# Altium PCB S88N_Occupancy_Detector.PcbDoc
Units mil, origin at the board's own origin, x right, y up, seen from the top; angles counter-clockwise.
Board outline 4800 x 4000 mil, 2 copper layers (Top Layer, Bottom Layer); 54 components, 90 nets, 338 pads, 4 vias.
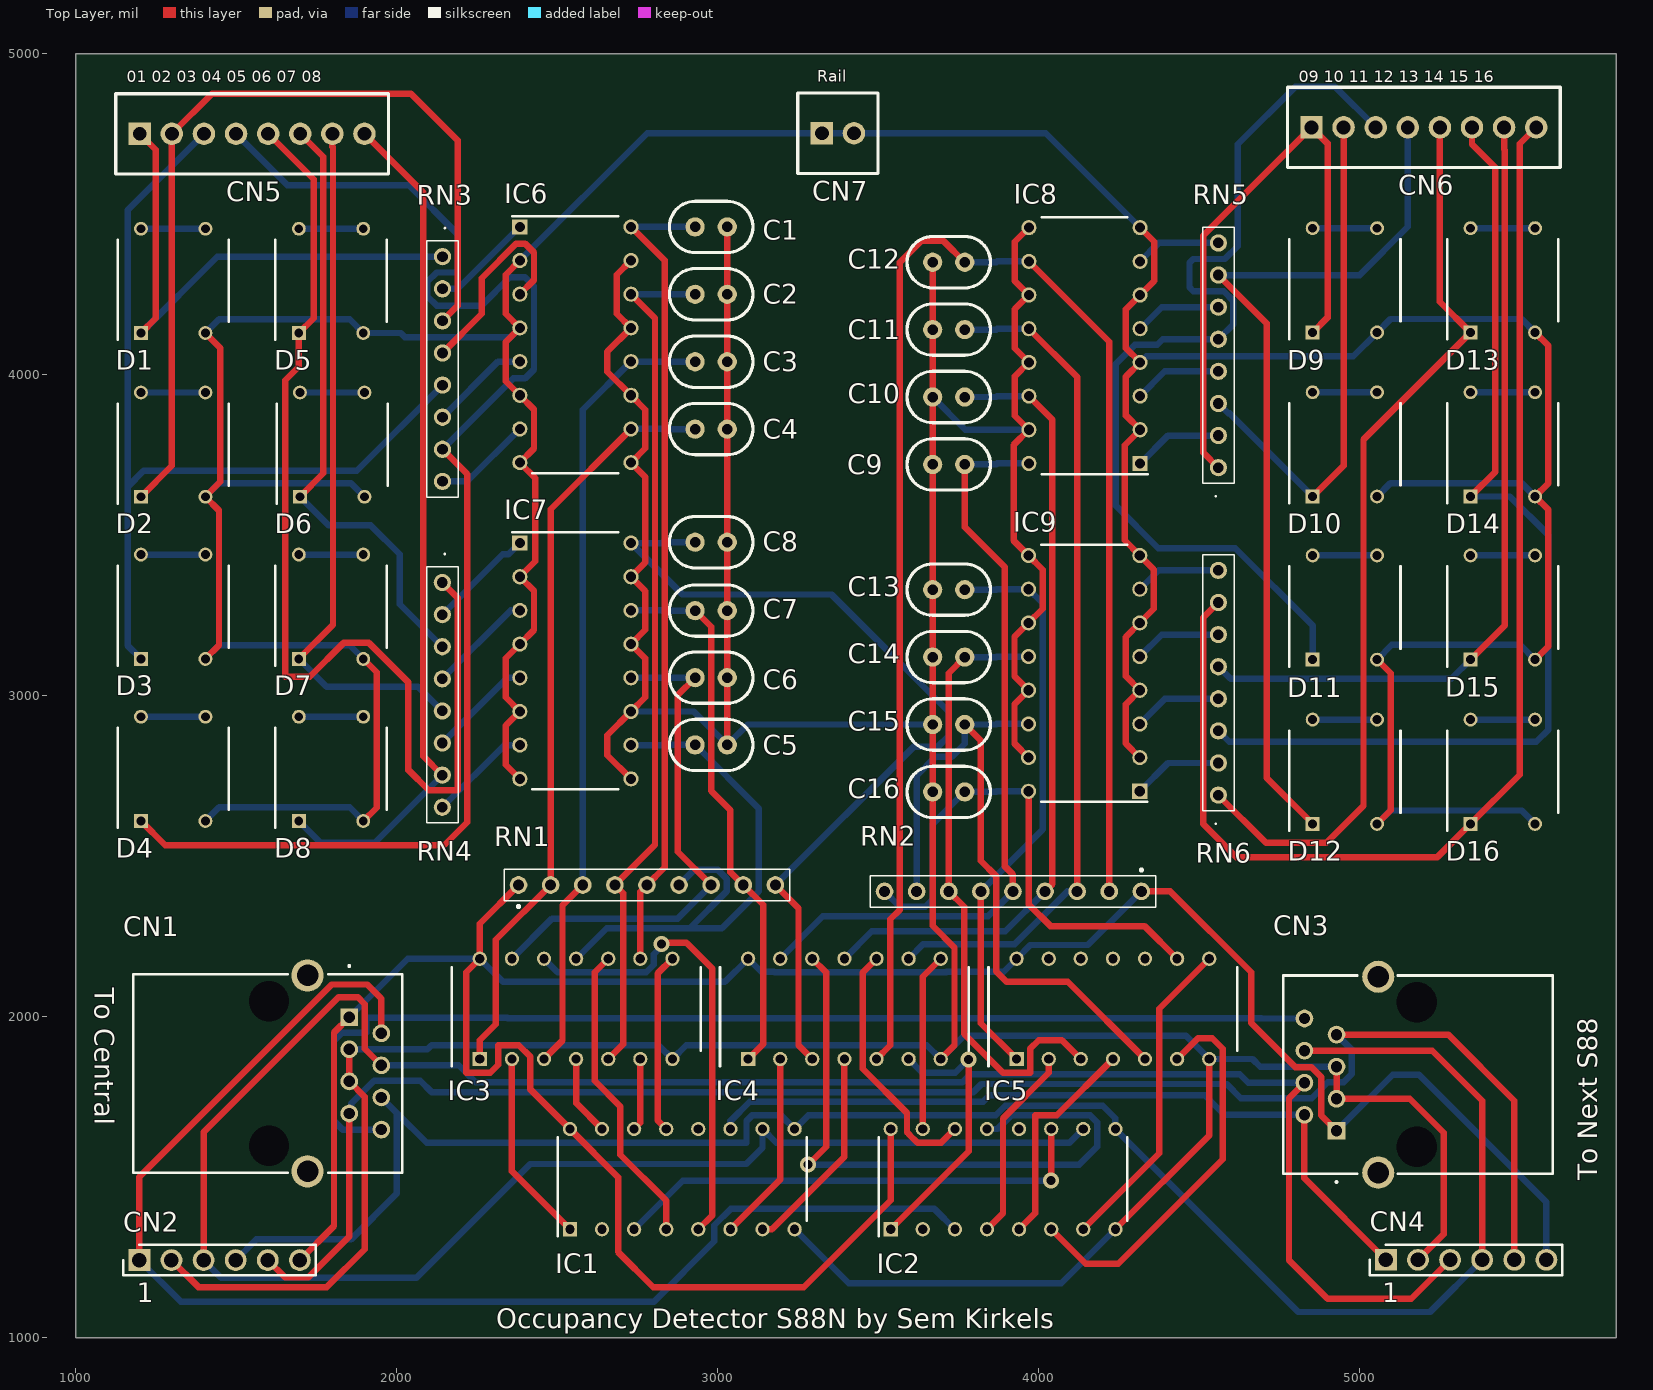
[diagram p0: Top Layer view]
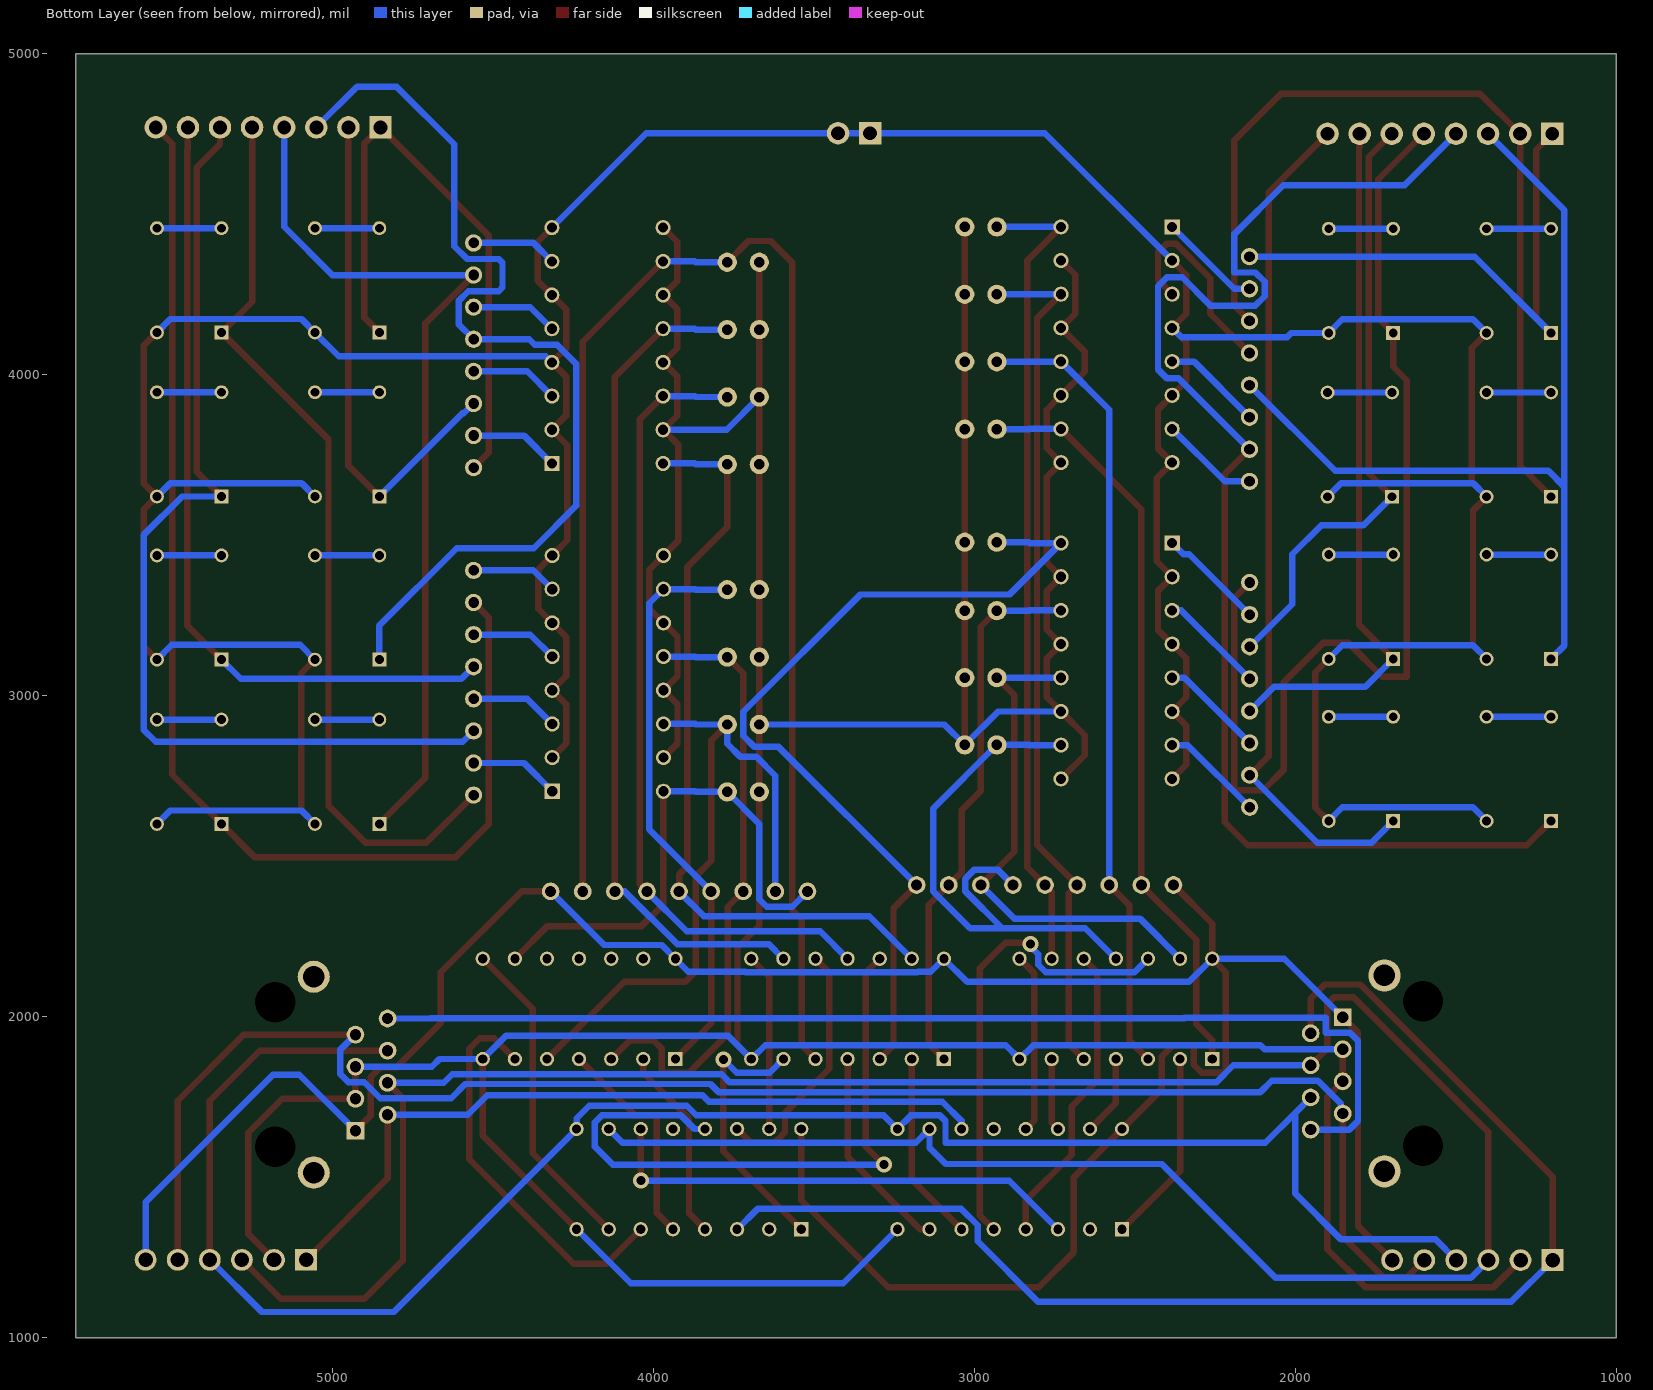
[diagram p1: Bottom Layer view, seen from below]
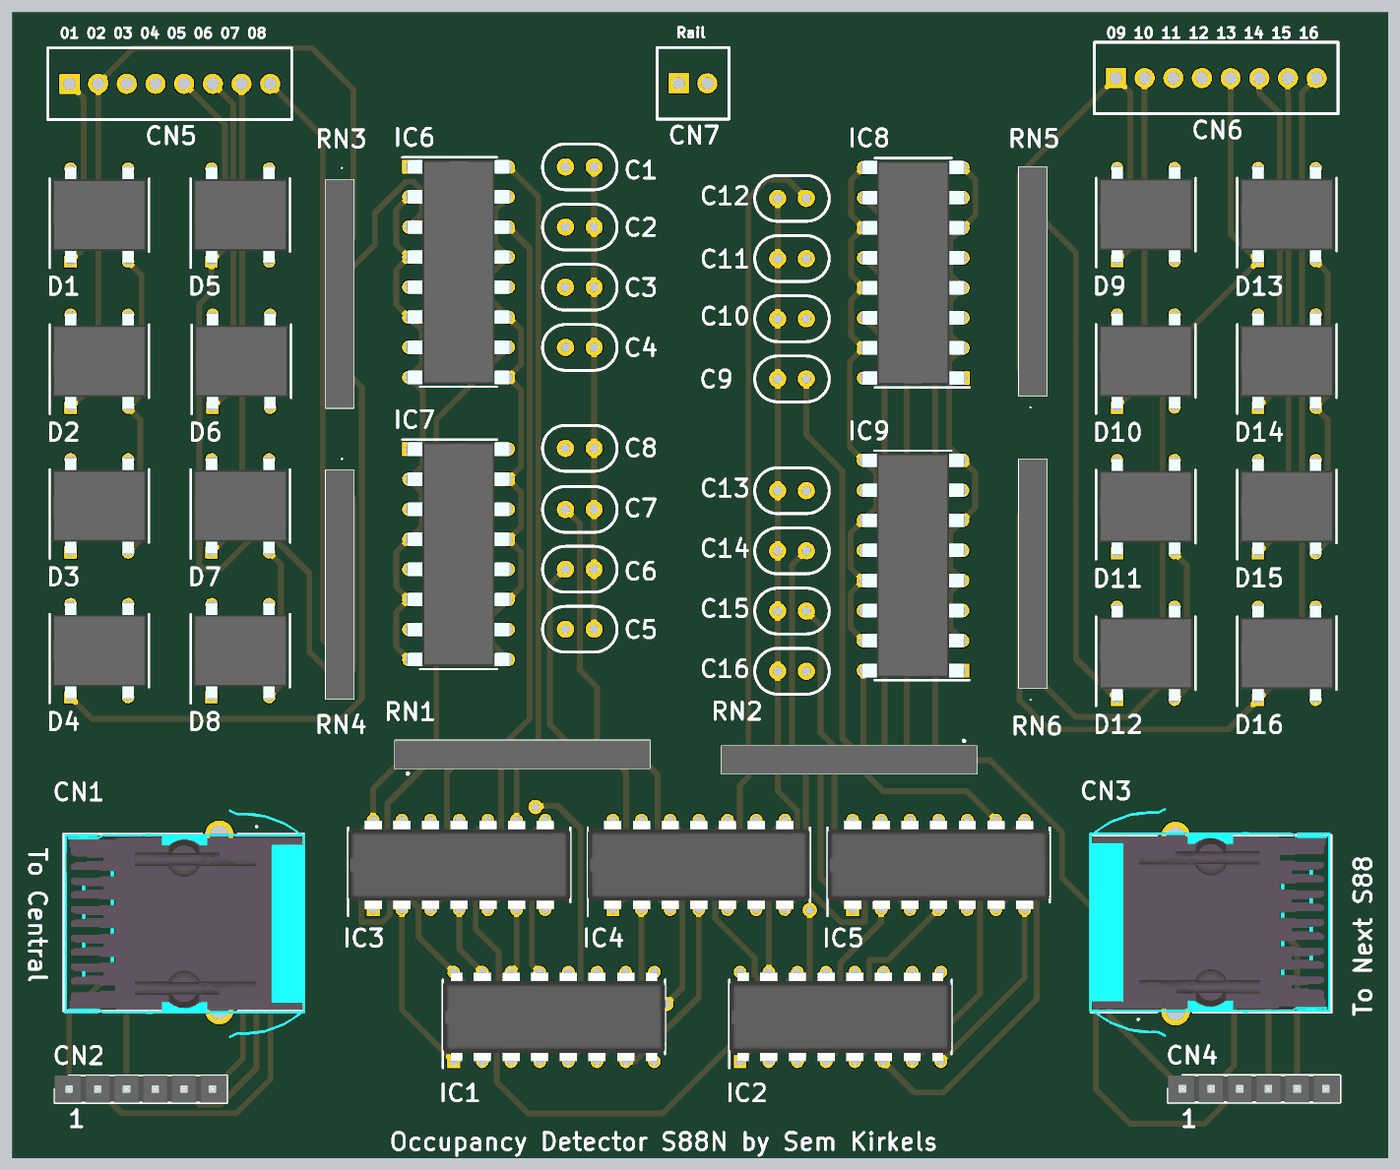
[diagram p2: 3D render of the assembled board from above, using the file's embedded part models]

## Layer stack, top to bottom
Top Solder: solder mask 0.4, Solder Resist, Dk 3.5
Top Layer: signal copper 1.4
Dielectric 1: dielectric 12.6, FR-4, Dk 4.8
Bottom Layer: signal copper 1.4
Bottom Solder: solder mask 0.4, Solder Resist, Dk 3.5

## Board outline
1000,1000 5800,1000 5800,5000 1000,5000

## Design rules (kind name [scope] priority, off if disabled: settings)
Clearance [All] p1: gap=10 ignorepadtopadclearanceinfootprint=FALSE except(0: Arc-Hole Track-Hole SMDPad-Hole THPad-Hole Via-Hole Fill-Hole Poly-Hole Region-Hole Text-Hole)
PolygonConnect [All] p1: connectstyle=Relief reliefconductorwidth=10 reliefentries=4 polygonreliefangle="90 Angle" airgapwidth=10
RoutingVias [All] p1: holewidth=28 width=50 viastyle="Through Hole" minholewidth=28 minwidth=50 maxholewidth=28 maxwidth=50
SolderMaskExpansion [All] p1: expansion=4 istentingtop=FALSE
Width [All] p1: maxlimit=20 minlimit=20 preferedwidth=20 minimp=50.000000 maximp=50.000000 favimp=50.000000
30 further rules are at their usual default settings.

## Classes and differential pairs
component class Databus: CN1 CN2 CN3 CN4
component class Shiftregister: IC1 IC2
component class Inverter: C1 C2 C3 C4 C5 C6 C7 C8 C9 C10 C11 C12 C13 C14 C15 C16 IC3 IC4 IC5 RN1 RN2
component class Current_Detection_Connectors: CN5 CN6 CN7
component class Current_Detection_9_16: D9 D10 D11 D12 D13 D14 D15 D16 IC8 IC9 RN5 RN6
component class Current_Detection_1_8: D1 D2 D3 D4 D5 D6 D7 D8 IC6 IC7 RN3 RN4

## Components (designator, comment, footprint, x,y, rotation, side; value= is the part's Value field where it differs from the comment)
C1 "10 nF" Capacitor 2930,4460 r0 top
C2 "10 nF" Capacitor 2930,4250 r0 top
C3 "10 nF" Capacitor 2930,4040 r0 top
C4 "10 nF" Capacitor 2930,3830 r0 top
C5 "10 nF" Capacitor 2930,2846.38 r0 top
C6 "10 nF" Capacitor 2930,3055.83 r0 top
C7 "10 nF" Capacitor 2930,3264.65 r0 top
C8 "10 nF" Capacitor 2930,3477.81 r0 top
C9 "10 nF" Capacitor 3770,3720 r180 top
C10 "10 nF" Capacitor 3770,3930 r180 top
C11 "10 nF" Capacitor 3770,4140 r180 top
C12 "10 nF" Capacitor 3770,4350 r180 top
C13 "10 nF" Capacitor 3770,3330 r180 top
C14 "10 nF" Capacitor 3770,3120 r180 top
C15 "10 nF" Capacitor 3770,2910 r180 top
C16 "10 nF" Capacitor 3770,2700 r180 top
CN1 "To Central" RJ45_Connector 1852.59,1998.18 r270 top
CN2 "To Central" "6 pin header" 1198.85,1241.54 r0 top
CN3 "To Next S88N" RJ45_Connector 4928.04,1644.06 r90 top
CN4 "To Next S88" "6 pin header" 5081.78,1242.48 r0 top
CN5 "DG308 2.54-8" "DG308 2.54-8" 1200,4750 r0 top
CN6 "DG308 2.54-8" "DG308 2.54-8" 4850,4770 r0 top
CN7 "DG308 2.54-2" "DG308 2.54-2" 3324.8,4751.63 r0 top
D1 "B140C1000DIP_DB101" FBR_B140C1000DIP 1304.06,4291.79 r90 top
D2 "B140C1000DIP_DB101" FBR_B140C1000DIP 1304.06,3781.79 r90 top
D3 "B140C1000DIP_DB101" FBR_B140C1000DIP 1304.06,3276.79 r90 top
D4 "B140C1000DIP_DB101" FBR_B140C1000DIP 1304.06,2771.79 r90 top
D5 "B140C1000DIP_DB101" FBR_B140C1000DIP 1795.94,4291.79 r90 top
D6 "B140C1000DIP_DB101" FBR_B140C1000DIP 1799.5,3781.79 r90 top
D7 "B140C1000DIP_DB101" FBR_B140C1000DIP 1795.94,3276.79 r90 top
D8 "B140C1000DIP_DB101" FBR_B140C1000DIP 1795.94,2771.79 r90 top
D9 "B140C1000DIP_DB101" FBR_B140C1000DIP 4954.06,4293.55 r90 top
D10 "B140C1000DIP_DB101" FBR_B140C1000DIP 4954.06,3782.49 r90 top
D11 "B140C1000DIP_DB101" FBR_B140C1000DIP 4954.06,3274.36 r90 top
D12 "B140C1000DIP_DB101" FBR_B140C1000DIP 4954.06,2762.7 r90 top
D13 "B140C1000DIP_DB101" FBR_B140C1000DIP 5445.94,4293.55 r90 top
D14 "B140C1000DIP_DB101" FBR_B140C1000DIP 5445.94,3782.49 r90 top
D15 "B140C1000DIP_DB101" FBR_B140C1000DIP 5445.94,3274.36 r90 top
D16 "B140C1000DIP_DB101" FBR_B140C1000DIP 5445.94,2762.7 r90 top
IC1 "CD4014BE" CD4014 2890,1493.7 r90 top
IC2 "CD4014BE" CD4014 3889.14,1493.7 r90 top
IC3 "SN74HC04N" SN74HC04 2559.35,2024.16 r90 top
IC4 "SN74HC04N" SN74HC04 3395.11,2024.16 r90 top
IC5 "SN74HC04N" SN74HC04 4231.48,2024.16 r90 top
IC6 "LTV-844" LTV844 2557.16,4092.86 r0 top
IC7 "LTV-844" LTV844 2557.16,3107.93 r0 top
IC8 "LTV-844" LTV844 4142.92,4090.35 r180 top
IC9 "LTV-844" LTV844 4141.96,3069.13 r180 top
RN1 "SIL 9-8 10K" "SIL 9-8 10K" 2380,2410 r0 top
RN2 "SIL 9-8 10K" "SIL 9-8 10K" 4320,2390 r180 top
RN3 "SIL 8-4 22" "SIL 8-4" 2142.91,4367.19 r270 top
RN4 "SIL 8-4 22" "SIL 8-4" 2142.5,3352.19 r270 top
RN5 "SIL 8-4 22" "SIL 8-4" 4560,3710 r90 top
RN6 "SIL 8-4 22" "SIL 8-4" 4560,2690 r90 top

## Footprints (in the part's own frame and the unit in brackets; to place one, negate y for a bottom-side part, rotate by r counter-clockwise, add the part's x,y. Pads: shape width x height; smd on the part's side, far side on the other; paste and mask are expansions set on the pad)
"6 pin header" [mm] "HDRV6W67P0X254_1X6_1524X241X1062P"
  rect 1.725x1.725 hole 1.15: 1(0,0)
  round 1.725 hole 1.15: 2(2.54,0) 3(5.08,0) 4(7.62,0) 5(10.16,0) 6(12.7,0)
  silkscreen extent -1.27,-1.2 13.97,1.21, body extent -1.27,-1.2 13.97,1.2, height 10.62
Capacitor [mil]
  round 60 hole 32.5: 1(0,0) 2(100,0)
  silkscreen extent -80,-80 180,80
CD4014 [mm] "DIP794W53P254L1930H508Q16N"
  rect 1.13x1.13 hole 0.73: 1(-3.97,8.89)
  round 1.13 hole 0.73: 2(-3.97,6.35) 3(-3.97,3.81) 4(-3.97,1.27) 5(-3.97,-1.27) 6(-3.97,-3.81) 7(-3.97,-6.35) 8(-3.97,-8.89) 9(3.97,-8.89) 10(3.97,-6.35) 11(3.97,-3.81) 12(3.97,-1.27) 13(3.97,1.27) 14(3.97,3.81) 15(3.97,6.35) 16(3.97,8.89)
  silkscreen extent -4.53,-9.84 3.3,9.84, body extent -3.94,-9.84 3.94,9.84, height 5.35
"DG308 2.54-2" [mil] "DG308 2.54-2"
  rect 70x70 hole 43.31: 1(0,0)
  round 70 hole 43.31: 2(100,0)
  silkscreen extent -75,-125 175,125
"DG308 2.54-8" [mil] "DG308 2.54-8"
  rect 70x70 hole 43.31: 1(0,0)
  round 70 hole 43.31: 2(100,0) 3(200,0) 4(300,0) 5(400,0) 6(500,0) 7(600,0) 8(700,0)
  silkscreen extent -75,-125 775,125
FBR_B140C1000DIP [mm]
  rect 1.1x1.1 hole 0.7: 1(-4.125,2.55)
  round 1.1 hole 0.7: 2(-4.125,-2.55) 3(4.125,-2.55) 4(4.125,2.55)
  silkscreen extent -4.68,-4.4 3.25,4.4, body extent -4.25,-4.15 4.25,4.15, height 4.9
LTV844 [mm]
  rect 1.2x1.2 hole 0.8: 1(-4.4,9.328)
  round 1.2 hole 0.8: 2(-4.4,6.662) 3(-4.4,3.998) 4(-4.4,1.332) 5(-4.4,-1.332) 6(-4.4,-3.998) 7(-4.4,-6.662) 8(-4.4,-9.328) 9(4.4,-9.328) 10(4.4,-6.662) 11(4.4,-3.998) 12(4.4,-1.332) 13(4.4,1.332) 14(4.4,3.998) 15(4.4,6.662) 16(4.4,9.328)
  silkscreen extent -5,-10.17 3.4,10.17, body extent -4.55,-9.93 4.55,9.93, height 4.5
RJ45_Connector [mm] "2562910000"
  rect 1.4x1.4 hole 0.9: 1(0,0)
  round 1.4 hole 0.9: 2(1.27,2.54) 3(2.54,0) 4(3.81,2.54) 5(5.08,0) 6(6.35,2.54) 7(7.62,0) 8(8.89,2.54)
  round 2.55 hole 1.7: MH1(-3.305,-3.3) MH2(12.195,-3.3)
  round 1.6 hole 3.2 unplated: MH3(-1.27,-6.35) MH4(10.16,-6.35)
  silkscreen extent -4.1,-17.1 12.29,4.2, body extent -5.61,-17.03 14.73,4.33, height 8.52
"SIL 8-4" [mm]
  round 1.365 hole 0.84: 1(0,0) 2(2.54,0) 3(5.08,0) 4(7.62,0) 5(10.16,0) 6(12.7,0) 7(15.24,0) 8(17.78,0)
  silkscreen extent -2.31,-1.24 19.02,1.24, body extent -1.24,-1.24 19.03,1.24, height 5.18
"SIL 9-8 10K" [mil] "CSC09A0110K0GEK"
  round 55 hole 33.86: 1(0,0) 2(100,0) 3(200,0) 4(300,0) 5(400,0) 6(500,0) 7(600,0) 8(700,0) 9(800,0)
  silkscreen extent -45,-71 845,49, body extent -45,-49 845,49, height 199
SN74HC04 [mm]
  rect 1.13x1.13 hole 0.73: 1(-3.97,7.62)
  round 1.13 hole 0.73: 2(-3.97,5.08) 3(-3.97,2.54) 4(-3.97,0) 5(-3.97,-2.54) 6(-3.97,-5.08) 7(-3.97,-7.62) 8(3.97,-7.62) 9(3.97,-5.08) 10(3.97,-2.54) 11(3.97,0) 12(3.97,2.54) 13(3.97,5.08) 14(3.97,7.62)
  silkscreen extent -4.53,-9.85 3.3,9.85, body extent -3.94,-9.84 3.94,9.84, height 5.09

## Part data
C1 C2 C3 C4 C5 C6 C7 C8 C9 C10 C11 C12 C13 C14 C15 C16: library part Capacitor, Capacitance=4.7nF, Case/Package=Radial, Dielectric=Y5U, Max Operating Temperature=125°C, Min Operating Temperature=-40°C, Package Quantity=500, Resistor Type=Ceramic, Tolerance=20%, Voltage=500V, Construction=RADIAL, Contact Plating=Tin, Depth=5mm, Diameter=16mm, Height=19mm, Height - Seated (Max)=0.787inch, Lead Diameter=0.6mm, Lead Pitch=10mm, Lead/Base Style=Kinked, Mount="Through Hole", Packaging="Tape and Reel", Radiation Hardening=No, RoHS Compliant=Yes, Series=VY1, Termination=Radial, Thickness=5mm, Voltage Rating (AC)=500V, Voltage Rating (DC)=500V
CN1 CN3: library part RJ45_Connector, "Connector", Manufacturer_Name=Weidmuller, Manufacturer_Part_Number=2562910000, Mouser Part Number=470-2562910000, Datasheet Link=https://catalog.weidmueller.com/catalog/Start.do?localeId=en&ObjectID=2562910000, Height=13.76mm, Mouser Price/Stock=https://www.mouser.co.uk/ProductDetail/Weidmuller/2562910000?qs=w%2Fv1CP2dgqr4xNEXLArdDQ%3D%3D
CN2 CN4: library part "6 pin header", "78511-406", Manufacturer_Name="Amphenol Communication Solutions", Mouser Part Number=649-78511-406, Arrow Part Number=78511-406, Arrow Price/Stock=https://www.arrow.com/en/products/78511-406/amphenol-fci, Datasheet Link=https://cdn.amphenol-cs.com/media/wysiwyg/files/drawing/68000.pdf, Height=10.62mm, Manufacturer_Part_Number=78511-406, Mouser Price/Stock=https://www.mouser.co.uk/ProductDetail/Amphenol-FCI/78511-406?qs=44C8ns5dLY9MkbPan6dMVA%3D%3D
CN5 CN6: library part 8_Pin_Screw_Connector
CN7: library part 2_Pin_Screw_Connector
D1 D2 D3 D4 D5 D6 D7 D8 D9 D10 D11 D12 D13 D14 D15 D16: "Bridge Rectifier", Manufacturer_Name=Rectron, Manufacturer_Part_Number=DB101, Mouser Part Number=583-DB101, Datasheet Link=http://www.rectron.com/data_sheets/db101-107.pdf, Height=4.9mm, Mouser Price/Stock=https://www.mouser.co.uk/ProductDetail/Rectron/DB101?qs=G5AQjGfRJcKGSaxDP6qXzQ%3D%3D
IC1 IC2: "Integrated Circuit", Manufacturer_Name="Texas Instruments", Mouser Part Number=595-CD4014BE, Arrow Part Number=CD4014BE, Arrow Price/Stock=https://www.arrow.com/en/products/cd4014be/texas-instruments?region=nac, Datasheet Link=http://www.ti.com/lit/gpn/cd4014b, Height=5.08mm, Manufacturer_Part_Number=CD4014BE, Mouser Price/Stock=https://www.mouser.co.uk/ProductDetail/Texas-Instruments/CD4014BE?qs=8k%2FZSzWMuCOtKecuorM4CQ%3D%3D
IC3 IC4 IC5: "Integrated Circuit", Manufacturer_Name="Texas Instruments", Mouser Part Number=595-SN74HC04N, Arrow Part Number=SN74HC04N, Arrow Price/Stock=https://www.arrow.com/en/products/sn74hc04n/texas-instruments?region=nac, Datasheet Link=http://www.ti.com/lit/gpn/sn74hc04, Height=5.08mm, Manufacturer_Part_Number=SN74HC04N, Mouser Price/Stock=https://www.mouser.co.uk/ProductDetail/Texas-Instruments/SN74HC04N?qs=L5CvrNUdZirrSGYiJvTylA%3D%3D
IC6 IC7 IC8 IC9: "Integrated Circuit", Manufacturer_Name=Lite-On, Mouser Part Number=859-LTV-844, Arrow Part Number=LTV-844, Arrow Price/Stock=https://www.arrow.com/en/products/ltv-844/lite-on-technology?region=nac, Datasheet Link=https://componentsearchengine.com/Datasheets/1/LTV-844.pdf, Height=4.5mm, Manufacturer_Part_Number=LTV-844, Mouser Price/Stock=https://www.mouser.co.uk/ProductDetail/Lite-On/LTV-844?qs=BZ0sscl82p8P4kyBjSwzAg%3D%3D
RN1 RN2: "CSC09A0110K0GEK", Manufacturer_Name=Vishay, Mouser Part Number=71-CSC09A0110K0GEK, Arrow Part Number=CSC09A0110K0GEK, Arrow Price/Stock=https://www.arrow.com/en/products/csc09a0110k0gek/vishay, Datasheet Link=https://www.vishay.com/docs/31509/csc.pdf, Height=4.95mm, Manufacturer_Part_Number=CSC09A0110K0GEK, Mouser Price/Stock=https://www.mouser.co.uk/ProductDetail/Vishay-Dale/CSC09A0110K0GEK?qs=Jzz%252BfO4IBMfusae2i1IhQQ%3D%3D
RN3 RN4 RN5 RN6: "Resistor Network", Arrow Part Number=4608X-102-102LF, Manufacturer_Name=Bourns, Mouser Part Number=652-4608X-2LF-1K, Arrow Price/Stock=https://www.arrow.com/en/products/4608x-102-102lf/bourns?region=europe, Datasheet Link=http://www.bourns.com/pdfs/4600X.pdf, Height=5.08mm, Manufacturer_Part_Number=4608X-102-102LF, Mouser Price/Stock=https://www.mouser.co.uk/ProductDetail/Bourns/4608X-102-102LF?qs=EFWIAreJVABaVln%252BuPVHjA%3D%3D

## Via types
v1: diameter 50, hole 28, Top Layer to Bottom Layer, 4 vias

## Nets (pads, with @x,y where several pads share a name; then routed paths per layer and width w, separated by ;. In a path a pad name is that pad's centre, name@x,y a point inside that pad or via, vN(x,y) a via of type N, cw(c..) or ccw(c..) an arc to the next point about the centre after c; other vN are vias at no path point)
GND: C1.2 C2.2 C3.2 C4.2 C5.2 C6.2 C7.2 C8.2 C9.2 C10.2 C11.2 C12.2 C13.2 C14.2 C15.2 C16.2 CN1.3 CN1.5 CN2.2 CN3.3 CN3.5 CN4.2 IC1.8 IC2.8 IC3.7 IC4.7 IC5.7 IC6.9 IC6.11 IC6.13 IC6.15 IC7.9 IC7.11 IC7.13 IC7.15 IC8.9 IC8.11 IC8.13 IC8.15 IC9.9 IC9.11 IC9.13 IC9.15 | length 16551.3
  Top Layer w20: CN2.2 1382.81,1157.58 1782.81,1157.58 1901,1275.77 1901,1749.77 CN1.5 CN1.3 ; IC7.9 2656.77,2814.31 2656.77,2876.91 IC7.11 2775,2995.14 2775,3115.76 IC7.13 2775,3204.98 2775,3325.61 IC7.15 2775,3414.82 2775,3681.01 IC6.9 2775,3770.22 2775,3890.85 IC6.11 2656.77,4009.08 2656.77,4071.68 IC6.13 2686,4189.69 2686,4310.75 IC6.15 ; C5.2 C6.2 C7.2 C8.2 C4.2 C3.2 C2.2 C1.2 ; C12.2 C11.2 C10.2 C9.2 C13.2 C14.2 C15.2 C16.2 3670,2283 3738,2215 3738,1910.75 IC4.7 ; IC9.15 3925,2850.58 3925,2972.96 IC9.13 3925,3060.43 3925,3182.8 IC9.11 4013,3270.8 4013,3392.11 IC9.9 3922,3483.11 3922,3780.37 IC8.15 3926,3871.75 3926,3994.21 IC8.13 3926,4081.6 3926,4204.06 IC8.11 3926,4291.44 3926,4413.9 IC8.9 ; IC2.8 4531.48,1629.75 IC5.7 ; CN3.5 CN3.3 5155.94,1744.06 5262,1638 5262,1322.69 CN4.2
  Bottom Layer w20: CN1.3 2096.18,1898.18 2109,1911 2816.22,1911 IC3.7 2902.49,1911 3651.98,1911 IC4.7 3768.25,1941 4458.35,1941 IC5.7 4666.13,1867.87 4689.94,1844.06 CN3.5 ; IC7.11 2925.85,2950.53 C5.2 3093.62,2910 C15.2 ; IC1.8 3408.4,1169 4070.73,1169 IC2.8 ; C10.2 3771.94,3828.06 IC8.15
NetC1_1: C1.1 IC3.9 IC6.16 RN1.5 | length 2554
  Top Layer w20: IC6.16 2835,4355.49 2835,2465 RN1.5 2759.35,2389.35 IC3.9
  Bottom Layer w20: IC6.16 2830,4460.1 2830.1,4460 C1.1
NetC2_1: C2.1 IC3.5 IC6.14 RN1.4 | length 2694.9
  Top Layer w20: IC3.5 2706,1914.51 2706,2384 RN1.4 2805,2535 2805,4175.65 IC6.14
  Bottom Layer w20: IC6.14 2830,4250.26 2830.26,4250 C2.1
NetC3_1: C3.1 IC3.3 IC6.12 RN1.3 | length 2484.6
  Top Layer w20: IC3.3 2517,1925.51 2517,2347 RN1.3
  Bottom Layer w20: RN1.3 2580,3890.03 IC6.12 2829,4040.42 2829.42,4040 C3.1
NetC4_1: C4.1 IC3.1 IC6.10 RN1.2 | length 2357.7
  Top Layer w20: IC3.1 2259.35,1926.67 2309,1976.32 2309,2239 RN1.2 2480,3580.18 IC6.10
  Bottom Layer w20: IC6.10 2829,3830.57 2829.57,3830 C4.1
NetC5_1: C5.1 IC3.11 IC7.10 RN1.6 | length 1775.2
  Bottom Layer w20: IC3.11 2654.35,2275.46 2913.46,2275.46 ; IC7.10 2829,2845.65 2829.73,2846.38 C5.1 3128,2648.38 3128,2390 3013.46,2275.46 2913.46,2275.46 ; RN1.6 2928,2458 3000,2458 3028,2430 3028,2390 2913.46,2275.46
NetC6_1: C6.1 IC3.13 IC7.12 RN1.7 | length 1626.7
  Top Layer w20: C6.1 2876,3001.83 2876,2514 RN1.7
  Bottom Layer w20: IC3.13 2484.35,2305.46 2875.46,2305.46 RN1.7 ; IC7.12 2830,3055.49 2830.34,3055.83 C6.1
NetC7_1: C7.1 IC4.1 IC7.14 RN1.8 | length 1703.9
  Top Layer w20: C7.1 2980,3214.65 2980,2703 3040,2643 3040,2450 RN1.8 3142,2348 3142,1914.75 IC4.1
  Bottom Layer w20: IC7.14 2829,3265.33 2829.68,3264.65 C7.1
NetC8_1: C8.1 IC4.3 IC7.16 RN1.9 | length 2805.3
  Top Layer w20: RN1.9 3252,2338 3252,1910.98 IC4.3
  Bottom Layer w20: C8.1 2830.64,3477.81 2828,3475.17 IC7.16 2890.57,3315 3355,3315 3720,2950 3720,2875 3685,2840 3610,2840 RN1.9
NetC9_1: C9.1 IC4.13 IC8.16 RN2.5 | length 2404.8
  Top Layer w20: C9.1 3770,3525 3895,3400 3895,2467.5 3920,2442.5 RN2.5
  Bottom Layer w20: IC4.13 3327.15,2312.5 3842.5,2312.5 RN2.5 ; C9.1 3868,3720 3871.1,3723.1 IC8.16
NetC10_1: C10.1 IC4.11 IC8.14 RN2.4 | length 2495.4
  Top Layer w20: IC8.14 4043,3859.64 4043,2413 RN2.4
  Bottom Layer w20: IC4.11 3480.65,2266 3896,2266 RN2.4 ; C10.1 3868,3930 3870.94,3932.94 IC8.14
NetC11_1: C11.1 IC4.9 IC8.12 RN2.3 | length 2627.6
  Top Layer w20: IC8.12 4120,3992.48 RN2.3
  Bottom Layer w20: IC4.9 3640.65,2226 3925.76,2226 4089.76,2390 RN2.3 ; C11.1 3868,4140 3870.79,4142.79 IC8.12
NetC12_1: C12.1 IC4.5 IC8.10 RN2.2 | length 5036.1
  Top Layer w20: IC4.5 3538,1910.75 3538,2303 3568,2333 3568,4350 3634,4416 3704,4416 C12.1 ; IC8.10 4220,4102.32 RN2.2
  Bottom Layer w20: C12.1 3868,4350 3870.63,4352.63 IC8.10
NetC13_1: C13.1 IC5.1 IC9.10 RN2.6 | length 1807.3
  Top Layer w20: RN2.6 3820,1979.35 IC5.1
  Bottom Layer w20: C13.1 3868,3330 3869.42,3331.42 IC9.10 4013,3287.15 4013,2583 RN2.6
NetC14_1: C14.1 IC5.3 IC9.12 RN2.7 | length 1938.4
  Top Layer w20: C14.1 3720,3070 RN2.7 3768,2342 3768,1946 3889,1825 3974,1825 3974,1900.65 4000,1926.65 4072.7,1926.65 IC5.3
  Bottom Layer w20: C14.1 3868,3120 3869.57,3121.57 IC9.12
NetC15_1: C15.1 IC5.5 IC9.14 RN2.8 | length 2197.1
  Top Layer w20: C15.1 3820,2860 3820,2485.5 3867.5,2438 3867.5,2141.5 3900,2109 4090.35,2109 IC5.5
  Bottom Layer w20: RN2.8 3620,2750 3680,2810 3730,2810 3770,2850 C15.1 3868,2910 3869.73,2911.73 IC9.14
NetC16_1: C16.1 IC5.9 IC9.16 RN2.9 | length 1639.2
  Top Layer w20: IC9.16 3968.73,2350 4036.73,2282 4329.95,2282 IC5.9
  Bottom Layer w20: RN2.9 3567.5,2342.5 3646.5,2342.5 3670,2366 3670,2600 C16.1 3868,2700 3869.89,2701.89 IC9.16
NetCN1_2: CN1.2 CN2.1 IC2.3 | length 4156.5
  Top Layer w20: CN2.1 1198.85,1500.52 1798.33,2100 1908.87,2100 1952.59,2056.27 CN1.2
  Bottom Layer w20: CN2.1 1328.39,1112 2802,1112 2990,1300 2990,1350 3041,1401 3675.54,1401 IC2.3
NetCN1_4: CN1.4 CN2.3 CN3.4 CN4.3 IC1.10 IC2.10 | length 8412.8
  Top Layer w20: CN2.3 1398.85,1639.59 1819.26,2060 1880,2060 1901,2039 1901,1899.77 CN1.4 ; CN3.4 4780,1746.02 4780,1241 4900,1121 5160.31,1121 CN4.3
  Bottom Layer w20: CN2.3 1453.39,1187 2062,1187 2416,1541 3089,1541 3140,1592 IC1.10 3183,1607 4096.14,1607 IC2.10 ; CN1.4 2193.82,1848.18 2247,1795 3762,1795 3787,1820 4627,1820 4652.94,1794.06 CN3.4
NetCN1_6: CN1.6 CN2.4 CN3.6 CN4.4 IC1.9 IC2.9 | length 5915.8
  Top Layer w20: CN3.6 5225.94,1894.06 5381.78,1738.22 CN4.4
  Bottom Layer w20: CN2.4 1563.31,1306 1858,1306 2001,1449 2001,1699.77 ; CN1.6 2001,1699.77 ; CN4.4 5219.31,1080 4809.14,1080 IC2.9 4239.14,1683.11 4200,1722.25 3896.14,1722.25 3866.89,1693 3283,1693 IC1.9 3197.75,1692.25 3107.25,1692.25 3090,1675 3090,1607 2093.77,1607 2001,1699.77
NetCN1_7: CN1.7 CN2.5 CN3.7 CN4.5 | length 5243.1
  Top Layer w20: CN2.5 1652.81,1187.58 1725,1187.58 1852.59,1315.18 CN1.7 ; CN3.7 5275.94,1944.06 5481.78,1738.22 CN4.5
  Bottom Layer w20: CN1.7 1859.31,1704.9 1859.31,1729.31 1930,1800 2074,1800 2109,1765 3797,1765 3822,1790 4586,1790 4630,1746 4851,1746 4901,1796 4950,1796 4976,1822 4976,1896.1 CN3.7
NetCN1_8: CN1.8 CN3.8 | length 3488.9
  Bottom Layer w20: CN1.8 1831.82,1648.18 1805,1675 1805,1925 1830,1950 1905,1950 1905,1996 2345,1996 2346,1995 4693,1995 4693.94,1994.06 CN3.8
NetCN3_2: CN3.2 CN4.1 IC1.11 | length 2428.1
  Top Layer w20: CN3.2 4828.04,1496.22 CN4.1
  Bottom Layer w20: IC1.11 3040,1675 3100,1735 3827,1735 3847,1755 4517.06,1755 4578,1694.06 CN3.2
NetCN5_1: CN5.1 D1.1 RN3.1 | length 1698.3
  Top Layer w20: CN5.1 1250,4700 1250,4175.73 D1.1
  Bottom Layer w20: D1.1 1441.46,4367.19 RN3.1
NetCN5_2: CN5.2 D2.1 RN3.3 | length 2754.7
  Top Layer w20: D2.1 1300,3715.73 CN5.2 1425,4875 2045,4875 2190,4730 2190,4214.27 RN3.3
NetCN5_3: CN5.3 D3.1 RN3.5 | length 2863.7
  Bottom Layer w20: D3.1 1162,3156.05 1162,3650 ; CN5.3 1162,4512 1162,3650 ; RN3.5 1875.73,3700 1212,3700 1162,3650
NetCN5_4: CN5.4 D4.1 RN3.7 | length 4400.5
  Top Layer w20: D4.1 1279.05,2534 2149,2534 2220,2605 2220,3690.1 RN3.7
  Bottom Layer w20: CN5.4 1660,4590 2038,4590 2190,4438 2190,4318 2125,4318 2096,4289 2096,4244 2125,4215 2265.05,4215 2353.05,4303 2400,4303 2428,4275 2428,4016 2400,3988 2363.73,3988 RN3.7
NetCN5_5: CN5.5 D5.1 RN4.1 | length 3384.4
  Top Layer w20: CN5.5 1742,4608 1742,4175.84 D5.1 1695,4129.39 1695,4024 1653,3982 1653,3059 1730,3059 1835,3164 1914,3164 2037,3041 2037,2768 2100,2705 2190,2705 2190,3304.69 RN4.1
NetCN5_6: CN5.6 D6.1 RN4.3 | length 1918.5
  Top Layer w20: D6.1 1772,3692.29 1772,4678 CN5.6
  Bottom Layer w20: D6.1 1788.49,3530 1920,3530 2010,3440 2010,3284.69 RN4.3
NetCN5_7: CN5.7 D7.1 RN4.5 | length 2194.7
  Top Layer w20: D7.1 1802,3220.84 1802,4708 1800,4710 CN5.7
  Bottom Layer w20: D7.1 1781.94,3028 2066.69,3028 RN4.5
NetCN5_8: CN5.8 D8.1 RN4.7 | length 2660.1
  Top Layer w20: CN5.8 2083,4567 2083,2811.69 RN4.7
  Bottom Layer w20: D8.1 1762.88,2542.06 1932.37,2542.06 RN4.7
NetCN6_1: CN6.1 D9.1 RN5.1 | length 1897.8
  Top Layer w20: RN5.1 4513,3757 4513,4433 CN6.1 4900,4720 4900,4177.48 D9.1
NetCN6_2: CN6.2 D10.1 RN5.3 | length 1603.6
  Top Layer w20: D10.1 4950,3716.43 CN6.2
  Bottom Layer w20: RN5.3 4591,3879 4594.75,3879 D10.1
NetCN6_3: CN6.3 D11.1 RN5.5 | length 3083.1
  Bottom Layer w20: D11.1 4853.66,3218.34 4613,3459 4373,3459 4240,3592 4240,4033 4300,4093 4370,4093 4387,4110 RN5.5 4606.87,4156.87 4606.87,4229.41 4576.28,4260 4481.72,4260 4470,4271.72 4470,4348.28 4481.72,4360 4580,4360 4620,4400 4620,4717 4800,4897 4923,4897 CN6.3
NetCN6_4: CN6.4 D12.1 RN5.7 | length 2793.5
  Top Layer w20: RN5.7 4710,4160 4710,2743.96 D12.1
  Bottom Layer w20: RN5.7 5000,4310 5150,4460 CN6.4
NetCN6_5: CN6.5 D13.1 RN6.1 | length 2852.5
  Top Layer w20: RN6.1 4709,2541 4896,2541 5012,2657 5012,3797.59 D13.1 5250,4226.7 CN6.5
NetCN6_6: CN6.6 D14.1 RN6.3 | length 3167.4
  Top Layer w20: D14.1 5422,3696.54 5422,4645 5350,4717 CN6.6
  Bottom Layer w20: RN6.3 4594,2856 5550,2856 5588,2894 5588,3500 5467.91,3620.09 D14.1
NetCN6_7: CN6.7 D15.1 RN6.5 | length 2529.1
  Top Layer w20: D15.1 5452,3218.41 5452,4699 5450,4701 CN6.7
  Bottom Layer w20: RN6.5 4598,3052 5285.59,3052 D15.1
NetCN6_8: CN6.8 D16.1 RN6.7 | length 3881.9
  Top Layer w20: RN6.7 4513,3243 4513,2600 4616,2497 5242.26,2497 D16.1 5499,2753.74 5499,4719 CN6.8
NetCN7_1: CN7.1 CN7.2 D1.2 D2.2 D3.2 D4.2 D5.2 D6.2 D7.2 D8.2 D9.2 D10.2 D11.2 D12.2 D13.2 D14.2 D15.2 D16.2 IC6.2 IC6.4 IC6.6 IC6.8 IC7.2 IC7.4 IC7.6 IC7.8 IC8.2 IC8.4 IC8.6 IC8.8 IC9.2 IC9.4 IC9.6 IC9.8 | length 14767.9
  Top Layer w20: D3.2 1447,3156.94 1447,3576.84 D2.2 1451,3665.94 1451,4082.84 D1.2 ; D8.2 1938,2651.05 1938,3072.73 D7.2 ; IC7.8 2340,2784.62 2340,2906.6 IC7.6 2340,2994.46 2340,3116.44 IC7.4 2428,3204.44 2428,3326.15 IC7.2 2432,3418.28 2432,3677.55 IC6.8 2428,3769.68 2428,3891.39 IC6.6 2340,3979.39 2340,4101.37 IC6.4 2340,4189.23 2340,4311.21 IC6.2 ; IC9.2 4271,2851.04 4271,2972.5 IC9.4 4271,3060.89 4271,3182.34 IC9.6 4359,3270.34 4359,3392.57 IC9.8 4268,3483.57 4268,3779.91 IC8.2 4272,3872.21 4272,3993.76 IC8.4 4272,4082.05 4272,4203.6 IC8.6 4360,4291.6 4360,4413.74 IC8.8 ; D12.2 5097,2642.85 5097,3069.41 D11.2 ; D15.2 5588,3153.62 5588,3578.43 D14.2 5588,3661.75 5588,4089.48 D13.2
  Bottom Layer w20: D4.2 1447.06,2652 1853.73,2652 D8.2 ; D3.2 1447.06,3157 1853.73,3157 D7.2 ; D2.2 1447.06,3662 1857.28,3662 D6.2 ; D1.2 1447.06,4172 1853.73,4172 D5.2 2012.61,4129.39 2026,4116 2354.63,4116 IC6.4 ; IC6.2 2780.42,4751.63 CN7.1 CN7.2 4022.11,4751.63 IC8.8 ; IC8.4 4335.24,4057 4980.3,4057 D9.2 5096.3,4173 5504.48,4173 D13.2 ; D12.2 5096.15,2642 5504.63,2642 D16.2 ; D11.2 5100.49,3158 5500.3,3158 D15.2 ; D10.2 5096.36,3662 5504.43,3662 D14.2
NetD1_3: D1.3 D1.4 | length 200.8
  Bottom Layer w20: D1.4 D1.3
NetD2_3: D2.3 D2.4 | length 200.8
  Bottom Layer w20: D2.4 D2.3
NetD3_3: D3.3 D3.4 | length 200.8
  Bottom Layer w20: D3.4 D3.3
NetD4_3: D4.3 D4.4 | length 200.8
  Bottom Layer w20: D4.4 D4.3
NetD5_3: D5.3 D5.4 | length 200.8
  Bottom Layer w20: D5.4 D5.3
NetD6_3: D6.3 D6.4 | length 200.8
  Bottom Layer w20: D6.4 D6.3
NetD7_3: D7.3 D7.4 | length 200.8
  Bottom Layer w20: D7.4 D7.3
NetD8_3: D8.3 D8.4 | length 200.8
  Bottom Layer w20: D8.4 D8.3
NetD9_3: D9.3 D9.4 | length 200.8
  Bottom Layer w20: D9.4 D9.3
NetD10_3: D10.3 D10.4 | length 200.8
  Bottom Layer w20: D10.4 D10.3
NetD11_3: D11.3 D11.4 | length 200.8
  Bottom Layer w20: D11.4 D11.3
NetD12_3: D12.3 D12.4 | length 200.8
  Bottom Layer w20: D12.4 D12.3
NetD13_3: D13.3 D13.4 | length 200.8
  Bottom Layer w20: D13.4 D13.3
NetD14_3: D14.3 D14.4 | length 200.8
  Bottom Layer w20: D14.4 D14.3
NetD15_3: D15.3 D15.4 | length 200.8
  Bottom Layer w20: D15.4 D15.3
NetD16_3: D16.3 D16.4 | length 200.8
  Bottom Layer w20: D16.4 D16.3
NetIC1_1: IC1.1 IC3.2 | length 605.3
  Top Layer w20: IC3.2 2359.35,1518.05 IC1.1
NetIC1_3: IC1.3 IC2.11 | length 1522.9
  Top Layer w20: v1(4039.14,1489) IC2.11
  Bottom Layer w20: IC1.3 2891.6,1489 v1(4039.14,1489)
NetIC1_4: IC1.4 IC3.10 | length 953
  Top Layer w20: IC3.10 2617,2138.11 2617,1800 2697,1720 2697,1570 2840,1427 IC1.4
NetIC1_5: IC1.5 IC3.12 | length 1466.8
  Top Layer w20: v1(2825.23,2226.43) 2828.8,2230 2903,2230 2983,2150 2983,1380.4 IC1.5
  Bottom Layer w20: IC3.12 2501.6,2138.22 2778.22,2138.22 2801.6,2161.6 2801.6,2194.68 2825.23,2218.31 v1(2825.23,2226.43)
NetIC1_6: IC1.6 IC4.2 | length 594.7
  Top Layer w20: IC1.6 3195.11,1492.51 IC4.2
NetIC1_7: IC1.7 IC4.4 | length 653.3
  Top Layer w20: IC1.7 3169.28,1337.4 3395.11,1563.24 IC4.4
NetIC1_13: IC1.13 IC3.8 | length 560.8
  Top Layer w20: IC1.13 2813,1677 2813,2134.11 IC3.8
NetIC1_14: IC1.14 IC3.6 | length 225.9
  Top Layer w20: IC1.14 2759.35,1669.35 IC3.6
NetIC1_15: IC1.15 IC3.4 | length 251.3
  Top Layer w20: IC3.4 2559.35,1730.65 IC1.15
NetIC2_1: IC2.1 IC4.6 | length 852
  Top Layer w20: IC2.1 3782,1580.27 v1(3782,1866.81)
  Bottom Layer w20: IC4.6 3637.98,1825 3740.19,1825 v1(3782,1866.81)
NetIC2_4: IC2.4 IC5.2 | length 610.1
  Top Layer w20: IC2.4 3889,1387.27 3889,1682.52 4031.48,1825 IC5.2
NetIC2_5: IC2.5 IC5.4 | length 690.9
  Top Layer w20: IC2.5 3989,1387.27 3989,1692.49 4056.11,1692.49 IC5.4
NetIC2_6: IC2.6 IC5.6 | length 1241.4
  Top Layer w20: IC2.6 4146.54,1230 4248,1230 4574,1556 4574,1900 4541.15,1932.85 4496.46,1932.85 IC5.6
NetIC2_7: IC2.7 IC5.8 | length 1005.6
  Top Layer w20: IC2.7 4376,1574.27 4376,2024.98 IC5.8
NetIC2_13: IC2.13 IC4.12 | length 2050.8
  Top Layer w20: v1(3282,1539) 3338,1595 3338,2137.58 IC4.12
  Bottom Layer w20: v1(3282,1539) 4126,1539 4182,1595 4182,1671 4160.75,1692.25 3914.14,1692.25 3871.89,1650 IC2.13
NetIC2_14: IC2.14 IC4.10 | length 796.5
  Top Layer w20: IC4.10 3452,2137.35 3452,1838 3590,1700 3590,1640 3596.89,1633.11 3596.89,1632.5 3621.64,1607.76 3622.24,1607.76 3623,1607 3696.14,1607 IC2.14
NetIC2_15: IC2.15 IC4.8 | length 553.7
  Top Layer w20: IC2.15 3639.14,2124.49 IC4.8
NetIC6_1: IC6.1 RN3.2 | length 320.9
  Bottom Layer w20: RN3.2 2191.02,4267.19 IC6.1
NetIC6_3: IC6.3 RN3.4 | length 650.7
  Top Layer w20: RN3.4 2265,4189.27 2265,4300 2373,4408 2400,4408 2428,4380 2428,4294.33 IC6.3
NetIC6_5: IC6.5 RN3.6 | length 312.8
  Bottom Layer w20: RN3.6 2316.15,4040.42 IC6.5
NetIC6_7: IC6.7 RN3.8 | length 308.7
  Bottom Layer w20: RN3.8 2220.55,3667.19 IC6.7
NetIC7_1: IC7.1 RN4.2 | length 333.8
  Bottom Layer w20: RN4.2 2330.32,3440 2348.76,3440 IC7.1
NetIC7_3: IC7.3 RN4.4 | length 329.7
  Bottom Layer w20: RN4.4 2355.65,3265.33 IC7.3
NetIC7_5: IC7.5 RN4.6 | length 325.6
  Bottom Layer w20: RN4.6 2345.81,3055.49 IC7.5
NetIC7_7: IC7.7 RN4.8 | length 321.6
  Bottom Layer w20: RN4.8 2335.96,2845.65 IC7.7
NetIC8_1: IC8.1 RN5.2 | length 279.8
  Bottom Layer w20: IC8.1 4403.05,3810 RN5.2
NetIC8_3: IC8.3 RN5.4 | length 275.8
  Bottom Layer w20: IC8.3 4393.2,4010 RN5.4
NetIC8_5: IC8.5 RN5.6 | length 271.7
  Bottom Layer w20: IC8.5 4383.36,4210 RN5.6
NetIC8_7: IC8.7 RN5.8 | length 267.6
  Bottom Layer w20: IC8.7 4373.52,4410 RN5.8
NetIC9_1: IC9.1 RN6.2 | length 281.3
  Bottom Layer w20: IC9.1 4403.3,2790 RN6.2
NetIC9_3: IC9.3 RN6.4 | length 277.2
  Bottom Layer w20: IC9.3 4393.46,2990 RN6.4
NetIC9_5: IC9.5 RN6.6 | length 273.2
  Bottom Layer w20: IC9.5 4383.62,3190 RN6.6
NetIC9_7: IC9.7 RN6.8 | length 269.1
  Bottom Layer w20: IC9.7 4373.77,3390 RN6.8
VCC: CN1.1 CN2.6 CN3.1 CN4.6 IC1.16 IC2.16 IC3.14 IC4.14 IC5.14 RN1.1 RN2.1 | length 8583.7
  Top Layer w20: CN2.6 1805,1347.69 1805,1950.59 CN1.1 ; RN1.1 2259.35,2289.35 IC3.14 2217,2138.11 2217,1825 2292,1825 2317,1850 2317,1911 2381,1911 2417,1875 2417,1773 IC1.16 2690,1500 2690,1267 2800,1157 3268,1157 3539.14,1428.14 IC2.16 ; RN2.1 4410,2390 4662,2138 4662,1980 4800,1842 4850,1842 4880,1812 4880,1692.1 CN3.1
  Bottom Layer w20: CN1.1 2034.88,2180.46 IC3.14 2331.6,2108.22 3022.87,2108.22 IC4.14 3135.58,2140 3175.83,2140 3177.61,2138.22 3712.61,2138.22 3714.39,2140 3891.02,2140 IC5.14 3974.02,2223 4153,2223 RN2.1 ; CN3.1 5102.98,1819 5185,1819 5581.78,1422.22 CN4.6
pads on no net: CN1.MH1 CN1.MH2 CN1.MH3 CN1.MH4 CN3.MH1 CN3.MH2 CN3.MH3 CN3.MH4 IC1.2 IC1.12 IC2.2 IC2.12 IC5.10 IC5.11 IC5.12 IC5.13

## Silkscreen, mask and mechanical layers (free items; w line width, h text height)
Top Overlay:
  text "Rail" at 3309.8,4911.63 h35
  text "01 02 03 04 05 06 07 08" at 1160,4910 h35
  text "09 10 11 12 13 14 15 16" at 4810,4910 h36
  text "To Central" at 1060,2090 h60 r270
  text "To Next S88" at 5740,1490 h60 r90
  text "1" at 1190,1110 h60
  text "1" at 5070,1110 h60
  text "Occupancy Detector S88N by Sem Kirkels" at 2310,1029.99 h60